# Altium PCB PCB_all_try_6_save.PcbDoc (part 2 of 2)
Units mm, origin at the board's own origin, x right, y up, seen from the top; angles counter-clockwise.
Board outline 465 x 330 mm, 2 copper layers (Top Layer, Bottom Layer); 484 components, 419 nets, 1565 pads, 0 vias.
Unrouted connection lines stored in the file: 1113.
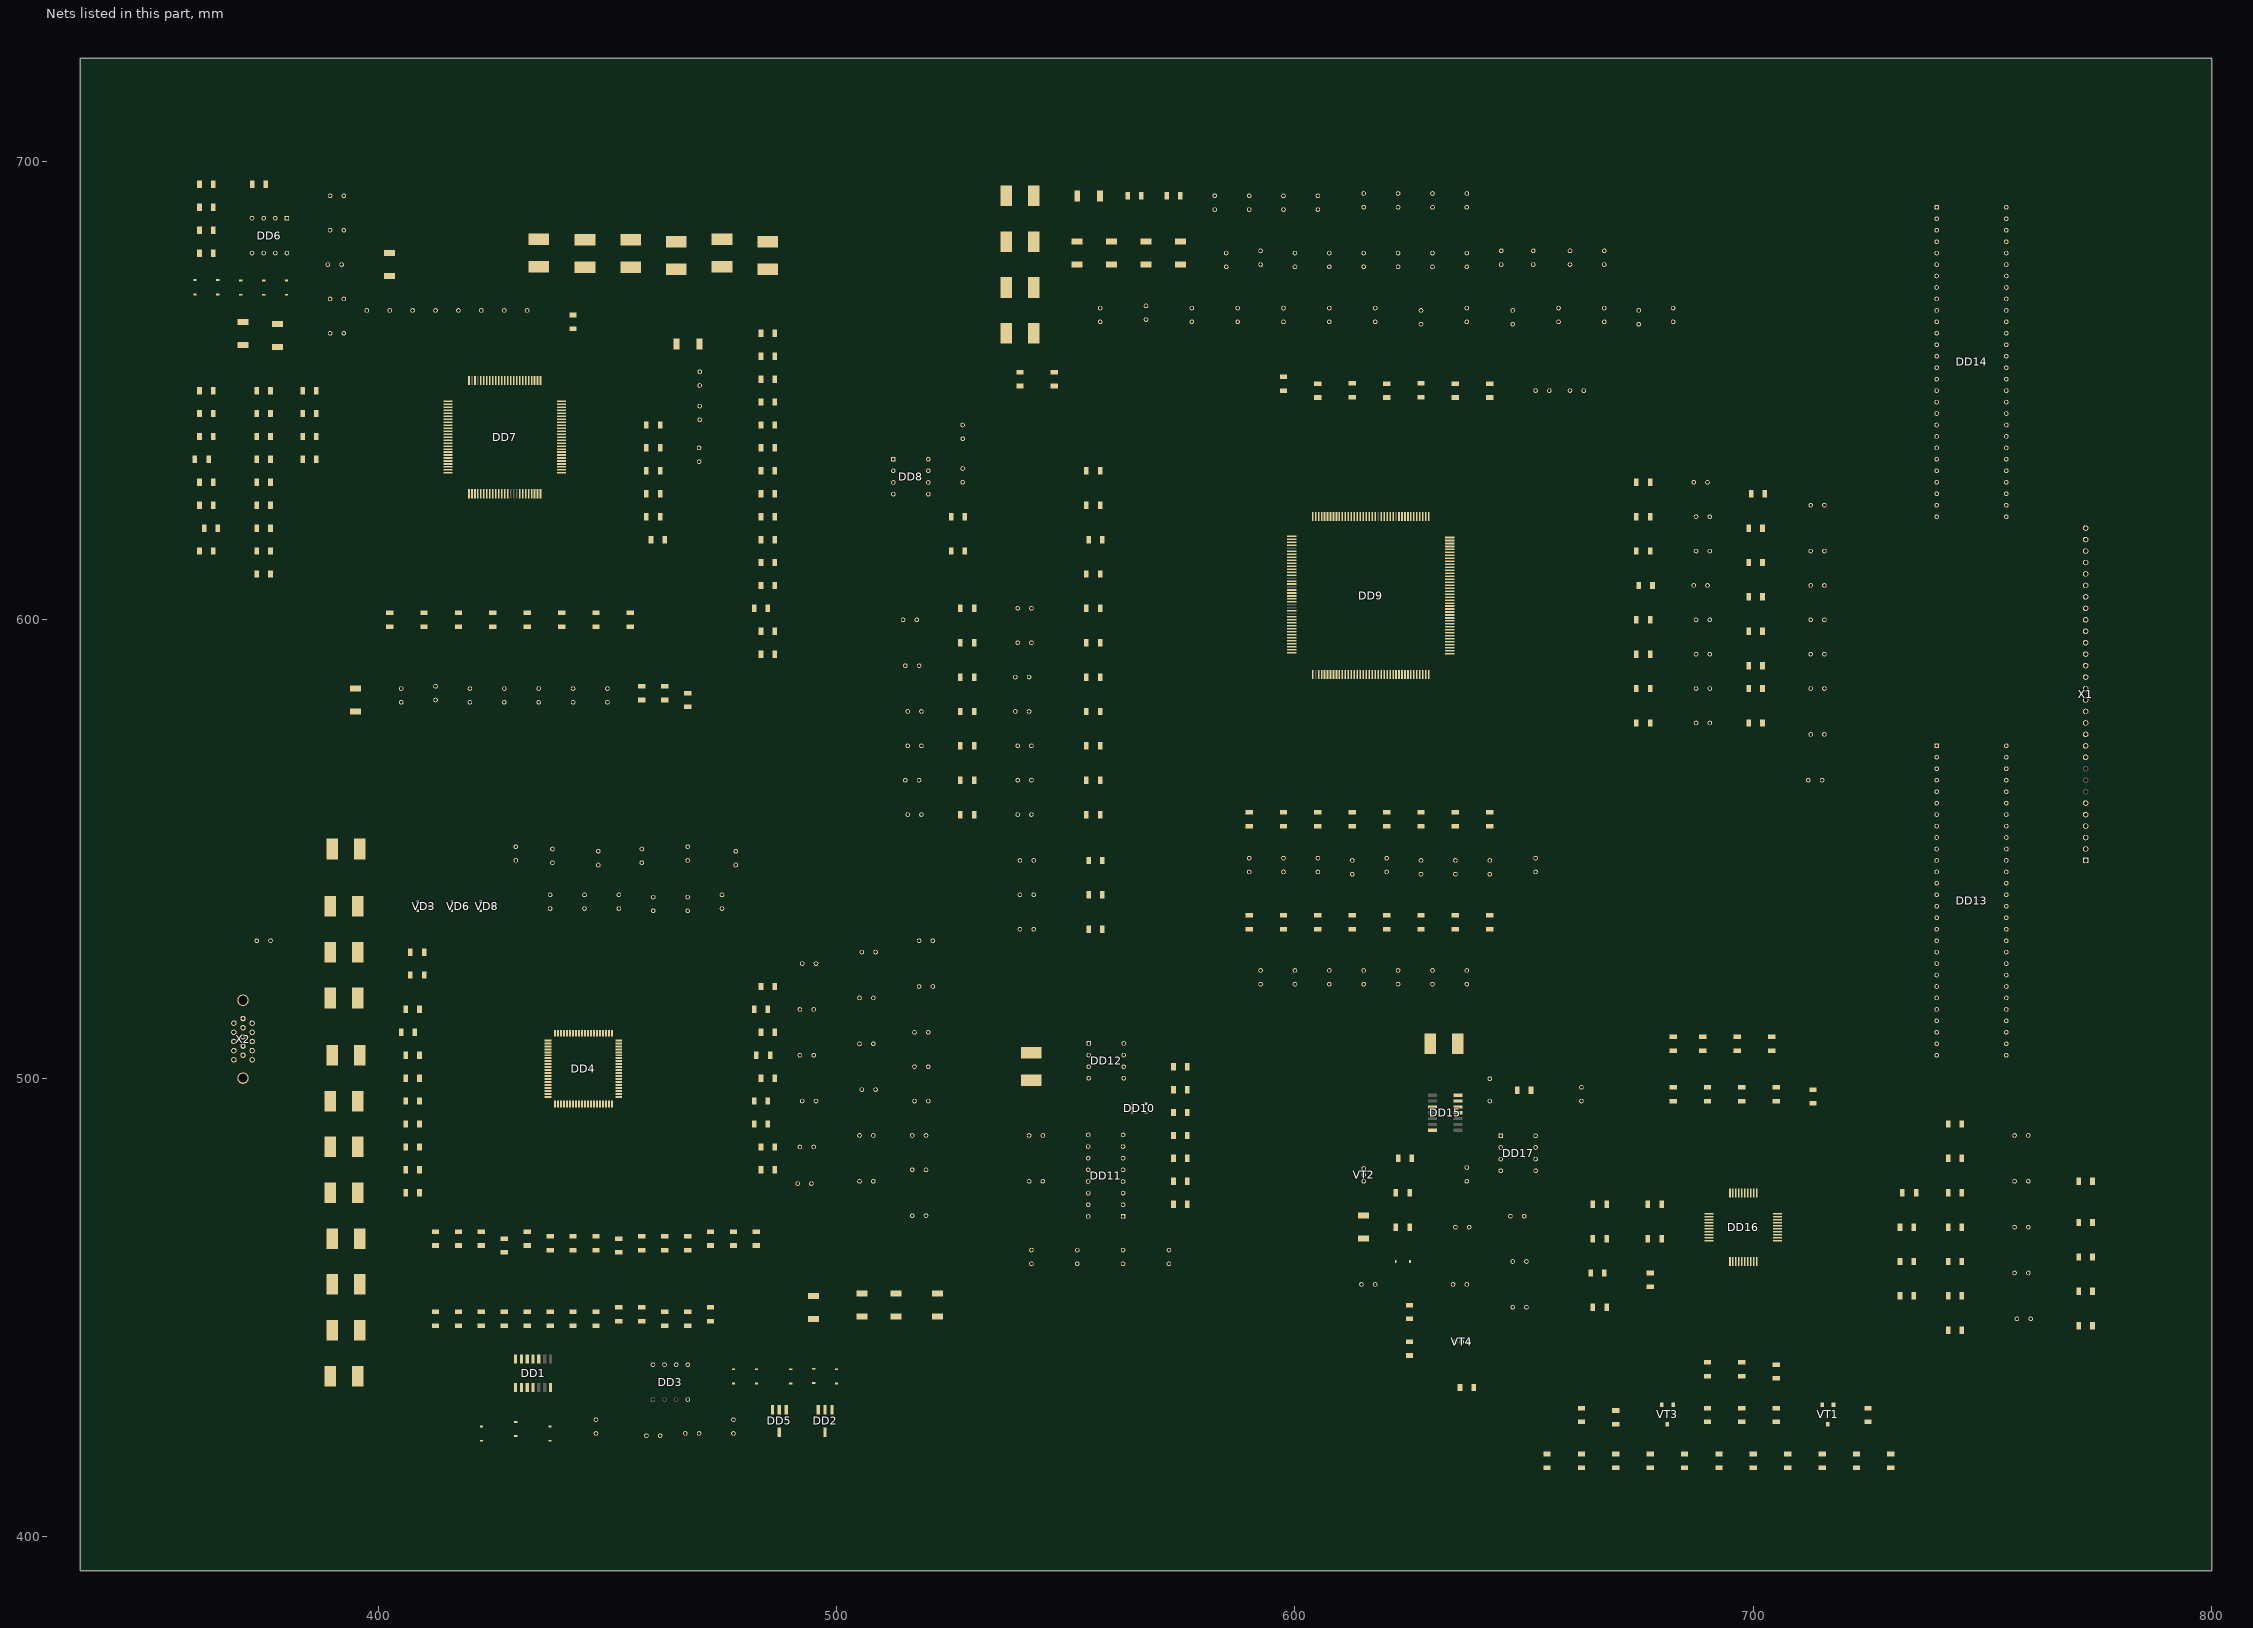
[diagram p2: the nets of this part, all layers, seen from the top]

## Part data
DD10: library part 74AHC1G14-TA
X2: library part VGA_connector
DD4: Built_By=EMA_UL_Team, Copyright="Copyright (C) 2018 Accelerated Designs. All rights reserved", Manufacturer_Part_Number=AD9883ABSTZ-140, RefDes=RefDes, SourceLibrary=Analog_2012-01-01_6, Type=DEV, Vendor="Analog Devices Inc"

## Nets (pads, with @x,y where several pads share a name; then routed paths per layer and width w, separated by ;. In a path a pad name is that pad's centre, name@x,y a point inside that pad or via, vN(x,y) a via of type N, cw(c..) or ccw(c..) an arc to the next point about the centre after c; other vN are vias at no path point)
3_3Va: L13.1 L14.1 L15.1 L18.1
3V3: C62.2 C171.1 DD1.14 DD8.8 DD15.14 DD17.2 DD17.8 L1.2 L7.2 L12.2 R110.1 R111.1 R181.2 R182.2 R187.2 R188.2 R202.2 R203.2 R210.1 R211.1 R212.1 R213.1 R214.1 R215.1 R216.1 R217.1 R219.1 R220.1 R221.1 R222.1 R223.1 R224.1 R225.1 R226.2 R227.1 R228.1 R229.1 R230.1 R238.2 R239.2 VT2.2 VT4.2
3V3b: C134.1 L19.1 L21.1 L22.1 L23.1
3V3LVDSA: C136.1 C139.2 C142.2 C145.2 C148.2 DD13.44 DD14.44 L22.2
3V3LVDSD: C135.1 C138.2 C141.2 C144.2 C147.2 C150.2 C151.2 C152.2 C153.2 C154.2 C155.2 C156.2 C157.2 DD13.1 DD13.9 DD13.26 DD14.1 DD14.9 DD14.26 L21.2 R177.2 R179.2
3V3LVDSP: C137.1 C140.2 C143.2 C146.2 C149.2 DD13.34 DD14.34 L23.2
3V3SD: C64.1 C65.2 C66.2 C67.2 C68.2 C69.2 C71.2 C73.2 C75.2 C77.2 C81.2 C85.2 C89.2 C94.2 C98.2 DD9.17 DD9.36 DD9.45 DD9.46 DD9.56 DD9.67 DD9.77 DD9.91 DD9.92 DD9.99 DD9.109 DD9.119 DD9.129 DD9.141 DD9.150 DD9.160 L19.2
5V_DDC: R50.2 R51.2 VD15.1
5V_STBY: C6.1 C9.1 C35.1 C36.1 C169.1 DD2.2 DD2.4 DD5.2 DD5.4 R1.2 R206.1 R207.1 R209.1 R236.2 VD9.1 VD16.1
5V_VGA: C172.2 VD10.1 X2.9
5Va: C130.2 DD11.16
5Vb: C128.1 DD10.5 L20.2
12MHZ: C158.1 DD9.16 DD15.12 L24.1
9883_HS: DD4.30 R14.2
9883_VS: DD1.10 DD4.31
+3V3: C1.1 C2.1 C3.1 C4.1 DD4.11 DD4.22 DD4.23 DD4.69 DD4.78 DD4.79 L1.1
A3_3V: C57.1 C58.2 C59.2 C60.2 DD7.82 DD7.84 DD7.88 DD7.95 L18.2 R59.1
A3V3: C12.1 C14.1 C26.1 C28.1 C30.1 C31.1 C32.1 C33.1 C34.1 DD2.3 DD4.26 DD4.27 DD4.39 DD4.42 DD4.45 DD4.46 DD4.51 DD4.52 DD4.59 DD4.62 L7.1
ADC1: DD16.34 R222.2
ADC2: DD16.33 R224.2
ASIC_H: C39.1 L9.2 R108.2
ASIC_RESET: DD8.7 DD11.9 DD16.11 R118.2 R182.1
ASIC_SCL: DD16.26 R114.2 R221.2
ASIC_SDA: DD16.25 R115.2 R219.2
AUDIO_EN: DD16.38 R215.2
AUDIO_MUTE: DD16.22 R212.2 R233.1
B_IN: L4.1 VD3.3 X2.3
B_INA0: DD9.147 R32.2
B_INA1: DD9.148 R31.2
B_INA2: DD9.149 R30.2
B_INA3: DD9.151 R29.2
B_INA4: DD9.152 R28.2
B_INA5: DD9.153 R27.2
B_INA6: DD9.154 R26.2
B_INA7: DD9.155 R25.2
B_INB0: DD9.1 R73.2 R97.2
B_INB1: DD9.2 R72.2 R96.2
B_INB2: DD9.3 R71.2 R95.2
B_INB3: DD9.4 R70.2 R94.2
B_INB4: DD9.6 R69.2 R93.2
B_INB5: DD9.7 R68.2 R92.2
B_INB6: DD9.8 R67.2 R91.2
B_INB7: DD9.9 R66.2 R90.2
BA0: C117.2 DD14.16 R136.1
BA1: C114.2 DD14.18 R135.1
BA2: C111.2 DD14.15 R134.1
BA3: C108.2 DD14.19 R133.1
BA4: C105.2 DD14.20 R132.1
BA5: C102.2 DD14.22 R131.1
BA6: C99.2 DD14.23 R128.1
BA7: C95.2 DD14.24 R127.1
BB0: C91.2 DD13.16 R126.1
BB1: C86.2 DD13.18 R125.1
BB2: C82.2 DD13.15 R124.1
BB3: C78.2 DD13.19 R123.1
BB4: C76.2 DD13.20 R122.1
BB5: C74.2 DD13.22 R121.1
BB6: C72.2 DD13.23 R120.1
BB7: C70.2 DD13.24 R119.1
BL_ON_OFF: R206.2
COAST: C25.2 DD4.29 R18.2
D3_3V: C42.1 C45.2 C47.2 C50.2 DD7.38 DD7.67 L13.2
D3_V3: DD7.3 DD7.4 DD7.6 DD7.7
DE_IN: DD9.159 R98.2
FBLK: DD9.23 R189.2
FCLK1: DD9.29 DD12.1
G_IN: L5.1 VD6.3 X2.2
G_INA0: DD9.125 R40.2
G_INA1: DD9.126 R39.2
G_INA2: DD9.127 R38.2
G_INA3: DD9.128 R37.2
G_INA4: DD9.130 R36.2
G_INA5: DD9.131 R35.2
G_INA6: DD9.133 R34.2
G_INA7: DD9.134 R33.2
G_INB0: DD9.136 R81.2 R89.2
G_INB1: DD9.137 R80.2 R88.2
G_INB2: DD9.139 R79.2 R87.2
G_INB3: DD9.140 R78.2 R86.2
G_INB4: DD9.142 R77.2 R85.2
G_INB5: DD9.143 R76.2 R84.2
G_INB6: DD9.144 R75.2 R83.2
G_INB7: DD9.145 R74.2 R82.2
GA0: C126.2 DD14.8 R152.1
GA1: C124.2 DD14.10 R151.1
GA2: C122.2 DD14.4 R150.1
GA3: C120.2 DD14.6 R149.1
GA4: C118.2 DD14.7 R148.1
GA5: C115.2 DD14.11 R147.1
GA6: C112.2 DD14.12 R146.1
GA7: C109.2 DD14.14 R145.1
GB0: C106.2 DD13.8 R144.1
GB1: C103.2 DD13.10 R143.1
GB2: C100.2 DD13.4 R142.1
GB3: C96.2 DD13.6 R141.1
GB4: C92.2 DD13.7 R140.1
GB5: C87.2 DD13.11 R139.1
GB6: C83.2 DD13.12 R138.1
GB7: C79.2 DD13.14 R137.1
GND: C1.2 C2.2 C3.2 C4.2 C5.2 C6.2 C7.2 C8.2 C9.2 C10.2 C11.2 C12.2 C13.2 C14.2 C15.2 C17.2 C18.2 C19.2 C25.1 C26.2 C27.1 C28.2 C29.1 C30.2 C31.2 C32.2 C33.2 C34.2 C35.2 C36.2 C37.2 C38.2 C39.2 C40.2 C41.2 C42.2 C43.2 C44.1 C45.1 C46.1 C47.1 C48.1 C49.1 C50.1 C51.1 C52.2 C53.1 C54.1 C55.1 C56.1 C57.2 C58.1 C59.1 C60.1 C61.1 C62.1 C63.1 C64.2 C65.1 C66.1 C67.1 C68.1 C69.1 C70.1 C71.1 C72.1 C73.1 C74.1 C75.1 C76.1 C77.1 C78.1 C79.1 C80.1 C81.1 C82.1 C83.1 C84.1 C85.1 C86.1 C87.1 C88.1 C89.1 C90.1 C91.1 C92.1 C93.1 C94.1 C95.1 C96.1 C97.1 C98.1 C99.1 C100.1 C101.1 C102.1 C103.1 C104.1 C105.1 C106.1 C107.1 C108.1 C109.1 C110.1 C111.1 C112.1 C113.1 C114.1 C115.1 C116.1 C117.1 C118.1 C119.1 C120.1 C121.1 C122.1 C123.1 C124.1 C125.1 C126.1 C127.1 C128.2 C129.2 C130.1 C131.2 C132.2 C133.2 C134.2 C135.2 C136.2 C137.2 C138.1 C139.1 C140.1 C141.1 C142.1 C143.1 C144.1 C145.1 C146.1 C147.1 C148.1 C149.1 C150.1 C151.1 C152.1 C153.1 C154.1 C155.1 C156.1 C157.1 C158.2 C159.1 C160.2 C161.2 C162.1 C163.2 C164.2 C165.1 C166.2 C168.2 C169.2 C170.2 C171.2 C172.1 DD1.7 DD2.1 DD3.4 DD4.1 DD4.10 DD4.20 DD4.21 DD4.24 DD4.25 DD4.28 DD4.32 DD4.36 DD4.38 DD4.40 DD4.41 DD4.44 DD4.47 DD4.50 DD4.53 DD4.55 DD4.60 DD4.61 DD4.63 DD4.68 DD4.80 DD5.1 DD6.1 DD6.2 DD6.4 DD7.1 DD7.5 DD7.19 DD7.28 DD7.39 DD7.45 DD7.58 DD7.68 DD7.76 DD7.98 DD7.100 DD8.1 DD8.2 DD8.3 DD8.4 DD9.12 DD9.35 DD9.43 DD9.48 DD9.51 DD9.61 DD9.71 DD9.72 DD9.82 DD9.83 DD9.94 DD9.104 DD9.116 DD9.124 DD9.135 DD9.146 DD9.156 DD10.3 DD11.6 DD11.7 DD11.8 DD12.3 DD12.4 DD13.5 DD13.13 DD13.21 DD13.25 DD13.27 DD13.28 DD13.29 DD13.33 DD13.35 DD13.36 DD13.43 DD13.49 DD13.53 DD14.5 DD14.13 DD14.21 DD14.25 DD14.27 DD14.28 DD14.29 DD14.33 DD14.35 DD14.36 DD14.43 DD14.49 DD14.53 DD15.7 DD16.20 DD17.1 DD17.3 DD17.4 DD17.7 L16.1 L17.1 R3.1 R5.1 R15.1 R16.1 R17.1 R49.1 R178.1 R180.1 R204.1 R205.1 R218.1 VD1.1 VD2.1 VD3.1 VD4.1 VD5.1 VD6.1 VD7.1 VD8.1 VD11.1 VD12.1 VD13.1 VD14.1 VD17.1 VT3.2 X1.4 X1.5 X1.6 X1.30 X2.4 X2.5 X2.6 X2.7 X2.8 X2.11 X2.16 X2.17
HP_SENSE: DD16.37 R217.2
HSYNC_D: DD7.48 DD11.12
HSYNC_IN: DD11.14 R184.1
HSYNC_X: DD9.41 DD10.2 R170.1
INPUT_SELECT: DD11.10 DD11.11 DD16.12 R181.1
LCD_CLK: DD13.31 DD14.31 R130.1
LCD_DE: DD13.30 DD14.30 R129.1
LCD_VCC: X1.1 X1.2 X1.3
LVDS_PD: DD13.32 DD14.32 DD16.39 R213.2
MCU_H_IN: DD11.13 L11.2
MCU_ISP_SCL: R12.1 R185.1
MCU_ISP_SDA: R13.1 R186.1
MCU_SCL1: DD16.32 R24.1 R230.2 R234.1
MCU_SDA1: DD16.31 R23.1 R229.2 R235.1
MCU_V_IN: DD11.1 L10.2
NetC7_1: C7.1 DD1.13 R6.2
NetC8_1: C8.1 DD1.1 R7.2
NetC11_1: C11.1 R11.2 R14.1
NetC15_1: C15.1 DD3.5 DD3.6 DD3.8 R9.2 R10.2 R12.2 R13.2 VD9.2 VD10.2 VD11.2
NetC16_1: C16.1 C20.1 DD4.33
NetC17_1: C17.1 C21.2 R19.2
NetC18_1: C18.1 C22.2 C23.2 R20.2
NetC19_1: C19.1 C24.2 R21.2
NetC20_2: C20.2 R22.2
NetC21_1: C21.1 DD4.54
NetC22_1: C22.1 DD4.49
NetC23_1: C23.1 DD4.48
NetC24_1: C24.1 DD4.43
NetC27_2: C27.2 DD4.58
NetC29_2: C29.2 DD4.37
NetC49_2: C49.2 C52.1 DD6.7 DD6.8 VD14.2 VD15.2 VD16.2
NetC55_2: C55.2 DD7.46 R98.1
NetC56_2: C56.2 DD7.44 R99.1
NetC61_2: C61.2 DD9.157 R108.1
NetC63_2: C63.2 DD9.158 R109.1
NetC90_2: C90.2 DD9.26 R169.2
NetC129_1: C129.1 DD12.2 R170.2 R173.2
NetC132_1: C132.1 C133.1 DD12.5 DD12.7 L20.1
NetC159_2: C159.2 DD16.13 R183.2
NetC160_1: C160.1 DD16.7 R199.2 ZQ1.2
NetC161_1: C161.1 DD16.8 R199.1 ZQ1.1
NetC162_2: C162.2 DD16.14 R184.2
NetC163_1: C163.1 C165.2 C167.2 DD16.18 R198.1 R200.1 R201.1
NetC164_1: C164.1 DD16.4 R195.1
NetC166_1: C166.1 DD16.3 R194.1
NetC167_1: C167.1 DD16.19 R205.2 VD17.2
NetC168_1: C168.1 DD16.2 R193.1
NetC170_1: C170.1 R208.2 VT1.1
NetDD1_2: DD1.2 DD1.3
NetDD1_4: DD1.4 R11.1
NetDD1_11: DD1.11 DD1.12
NetDD4_2: DD4.2 R33.1
NetDD4_3: DD4.3 R34.1
NetDD4_4: DD4.4 R35.1
NetDD4_5: DD4.5 R36.1
NetDD4_6: DD4.6 R37.1
NetDD4_7: DD4.7 R38.1
NetDD4_8: DD4.8 R39.1
NetDD4_9: DD4.9 R40.1
NetDD4_12: DD4.12 R41.1
NetDD4_13: DD4.13 R42.1
NetDD4_14: DD4.14 R43.1
NetDD4_15: DD4.15 R44.1
NetDD4_16: DD4.16 R45.1
NetDD4_17: DD4.17 R46.1
NetDD4_18: DD4.18 R47.1
NetDD4_19: DD4.19 R48.1
NetDD4_56: DD4.56 R24.2
NetDD4_57: DD4.57 R23.2
NetDD4_64: DD4.64 L10.1
NetDD4_65: DD4.65 L11.1
NetDD4_66: DD4.66 L9.1
NetDD4_67: DD4.67 L8.1
NetDD4_70: DD4.70 R25.1
NetDD4_71: DD4.71 R26.1
NetDD4_72: DD4.72 R27.1
NetDD4_73: DD4.73 R28.1
NetDD4_74: DD4.74 R29.1
NetDD4_75: DD4.75 R30.1
NetDD4_76: DD4.76 R31.1
NetDD4_77: DD4.77 R32.1
NetDD6_3: DD6.3 R49.2
NetDD6_5: DD6.5 R51.1 R53.2 VD13.2
NetDD6_6: DD6.6 R50.1 R52.2 VD12.2
NetDD7_8: DD7.8 R56.1 R62.2
NetDD7_9: DD7.9 R57.1 R62.1
NetDD7_10: DD7.10 R73.1
NetDD7_11: DD7.11 R72.1
NetDD7_12: DD7.12 R71.1
NetDD7_13: DD7.13 R70.1
NetDD7_14: DD7.14 R69.1
NetDD7_15: DD7.15 R68.1
NetDD7_16: DD7.16 R67.1
NetDD7_17: DD7.17 R66.1
NetDD7_20: DD7.20 R89.1
NetDD7_21: DD7.21 R88.1
NetDD7_22: DD7.22 R87.1
NetDD7_23: DD7.23 R86.1
NetDD7_24: DD7.24 R85.1
NetDD7_25: DD7.25 R84.1
NetDD7_26: DD7.26 R83.1
NetDD7_27: DD7.27 R82.1
NetDD7_30: DD7.30 R107.1
NetDD7_31: DD7.31 R106.1
NetDD7_32: DD7.32 R105.1
NetDD7_33: DD7.33 R104.1
NetDD7_34: DD7.34 R103.1
NetDD7_35: DD7.35 R102.1
NetDD7_36: DD7.36 R101.1
NetDD7_37: DD7.37 R100.1
NetDD7_49: DD7.49 R97.1
NetDD7_50: DD7.50 R96.1
NetDD7_51: DD7.51 R95.1
NetDD7_52: DD7.52 R94.1
NetDD7_53: DD7.53 R93.1
NetDD7_54: DD7.54 R92.1
NetDD7_55: DD7.55 R91.1
NetDD7_56: DD7.56 R90.1
NetDD7_59: DD7.59 R81.1
NetDD7_60: DD7.60 R80.1
NetDD7_61: DD7.61 R79.1
NetDD7_62: DD7.62 R78.1
NetDD7_63: DD7.63 R77.1
NetDD7_64: DD7.64 R76.1
NetDD7_65: DD7.65 R75.1
NetDD7_66: DD7.66 R74.1
NetDD7_69: DD7.69 R65.1
NetDD7_70: DD7.70 R64.1
NetDD7_71: DD7.71 R63.1
NetDD7_72: DD7.72 R61.1
NetDD7_73: DD7.73 R60.1
NetDD7_74: DD7.74 R58.1
NetDD7_75: DD7.75 R55.1
NetDD7_77: DD7.77 R54.1
NetDD7_80: DD7.80 RX_D2+.1
NetDD7_81: DD7.81 RX_D2-.1
NetDD7_85: DD7.85 RX_D1+.1
NetDD7_86: DD7.86 RX_D1-.1
NetDD7_90: DD7.90 RX_D0+.1
NetDD7_91: DD7.91 RX_D0-.1
NetDD7_93: DD7.93 RX_CLK+.1
NetDD7_94: DD7.94 RX_CLK-.1
NetDD7_96: DD7.96 R59.2
NetDD8_5: DD8.5 R111.2 R117.2
NetDD9_11: DD9.11 R113.1 R117.1
NetDD9_13: DD9.13 R114.1
NetDD9_14: DD9.14 R115.1
NetDD9_19: DD9.19 R118.1
NetDD9_33: DD9.33 R130.2
NetDD9_34: DD9.34 R129.2
NetDD9_37: DD9.37 R168.2
NetDD9_38: DD9.38 R167.2
NetDD9_39: DD9.39 R166.2
NetDD9_40: DD9.40 R165.2
NetDD9_44: DD9.44 R164.2
NetDD9_47: DD9.47 R163.2
NetDD9_49: DD9.49 R162.2
NetDD9_50: DD9.50 R161.2
NetDD9_52: DD9.52 R160.2
NetDD9_53: DD9.53 R159.2
NetDD9_54: DD9.54 R158.2
NetDD9_55: DD9.55 R157.2
NetDD9_57: DD9.57 R156.2
NetDD9_58: DD9.58 R155.2
NetDD9_59: DD9.59 R154.2
NetDD9_60: DD9.60 R153.2
NetDD9_62: DD9.62 R152.2
NetDD9_63: DD9.63 R151.2
NetDD9_64: DD9.64 R150.2
NetDD9_65: DD9.65 R149.2
NetDD9_66: DD9.66 R148.2
NetDD9_68: DD9.68 R147.2
NetDD9_69: DD9.69 R146.2
NetDD9_70: DD9.70 R145.2
NetDD9_73: DD9.73 R144.2
NetDD9_74: DD9.74 R143.2
NetDD9_75: DD9.75 R142.2
NetDD9_76: DD9.76 R141.2
NetDD9_78: DD9.78 R140.2
NetDD9_79: DD9.79 R139.2
NetDD9_80: DD9.80 R138.2
NetDD9_81: DD9.81 R137.2
NetDD9_84: DD9.84 R136.2
NetDD9_85: DD9.85 R135.2
NetDD9_86: DD9.86 R134.2
NetDD9_87: DD9.87 R133.2
NetDD9_88: DD9.88 R132.2
NetDD9_89: DD9.89 R131.2
NetDD9_90: DD9.90 R128.2
NetDD9_93: DD9.93 R127.2
NetDD9_95: DD9.95 R126.2
NetDD9_96: DD9.96 R125.2
NetDD9_97: DD9.97 R124.2
NetDD9_98: DD9.98 R123.2
NetDD9_100: DD9.100 R122.2
NetDD9_101: DD9.101 R121.2
NetDD9_102: DD9.102 R120.2
NetDD9_103: DD9.103 R119.2
NetDD10_4: DD10.4 R173.1
NetDD11_3: DD11.3 R172.2
NetDD11_4: DD11.4 R174.1
NetDD11_5: DD11.5 R171.2
NetDD12_6: DD12.6 R176.1
NetDD12_8: DD12.8 R175.1
NetDD13_17: DD13.17 R177.1 R178.2
NetDD13_37: DD13.37 X1.10
NetDD13_38: DD13.38 X1.11
NetDD13_39: DD13.39 X1.12
NetDD13_40: DD13.40 X1.13
NetDD13_41: DD13.41 X1.14
NetDD13_42: DD13.42 X1.15
NetDD13_45: DD13.45 X1.16
NetDD13_46: DD13.46 X1.17
NetDD13_47: DD13.47 X1.18
NetDD13_48: DD13.48 X1.19
NetDD14_17: DD14.17 R179.1 R180.2
NetDD14_37: DD14.37 X1.20
NetDD14_38: DD14.38 X1.21
NetDD14_39: DD14.39 X1.22
NetDD14_40: DD14.40 X1.23
NetDD14_41: DD14.41 X1.24
NetDD14_42: DD14.42 X1.25
NetDD14_45: DD14.45 X1.26
NetDD14_46: DD14.46 X1.27
NetDD14_47: DD14.47 X1.28
NetDD14_48: DD14.48 X1.29
NetDD15_3: DD15.3 L24.2
NetDD15_11: DD15.11 R196.1 R197.1
NetDD15_13: DD15.13 DD16.9 R188.1
NetDD16_1: DD16.1 R192.1
NetDD16_6: DD16.6 R202.1
NetDD16_15: DD16.15 R185.2 R198.2
NetDD16_16: DD16.16 R186.2 R200.2
NetDD16_23: DD16.23 R214.2 R231.1
NetDD16_24: DD16.24 R216.2 R232.1
NetDD16_40: DD16.40 R207.2 R208.1
NetDD16_42: R189.1 R204.2
NetDD16_43: R190.1
NetDD16_44: R191.1
NetDD17_5: DD17.5 R235.2
NetDD17_6: DD17.6 R234.2
NetL2_2: L2.2 R9.1 VD4.2
NetL3_2: L3.2 R10.1 VD7.2
NetL4_2: L4.2 R15.2 R19.1
NetL5_2: L5.2 R16.2 R20.1
NetL6_2: L6.2 R17.2 R21.1
NetR209_2: R209.2 VT1.3
NetR218_2: R218.2 R226.1 VT1.2
NetR231_2: R231.2 VT2.1
NetR232_2: R232.2 VT4.1
NetR233_2: R233.2 VT3.1
NetR236_1: R236.1 R237.1 VT3.3
NetR238_1: R238.1 VT4.3
NetR239_1: R239.1 VT2.3
O3_3V: C43.1 C46.2 C48.2 C51.2 C53.2 C54.2 DD7.18 DD7.29 DD7.43 DD7.57 DD7.78 L14.2
OSD_B: DD9.22 R190.2
OSD_CLK: C131.1 DD9.30 R175.2 R176.2 R193.2
OSD_G: DD9.21 R191.2
OSD_HS: DD9.31 R194.2
OSD_R: DD9.20 R192.2
OSD_VS: DD9.32 R195.2
P3_3V: C41.1 C44.2 L15.2
P3V3: C16.2 C38.1 C40.1 DD4.34 DD4.35 DD5.3 L12.1 R22.1 R52.1 R53.1 R237.2
PD: DD7.2 DD16.30 R228.2
PDO: DD16.29 R57.2 R227.2
PKA_GND: DD7.79 DD7.83 DD7.87 DD7.89 DD7.92 L16.2 L17.2
POWER_ON_OFF: DD16.21 R211.2
PSC0: DD16.35 R220.2
PSC1: DD16.36 R210.2
R_IN: L6.1 VD8.3 X2.1
R_INA0: DD9.105 R48.2
R_INA1: DD9.106 R47.2
R_INA2: DD9.107 R46.2
R_INA3: DD9.108 R45.2
R_INA4: DD9.110 R44.2
R_INA5: DD9.111 R43.2
R_INA6: DD9.112 R42.2
R_INA7: DD9.113 R41.2
R_INB0: DD9.114 R65.2 R107.2
R_INB1: DD9.115 R64.2 R106.2
R_INB2: DD9.117 R63.2 R105.2
R_INB3: DD9.118 R61.2 R104.2
R_INB4: DD9.120 R60.2 R103.2
R_INB5: DD9.121 R58.2 R102.2
R_INB6: DD9.122 R55.2 R101.2
R_INB7: DD9.123 R54.2 R100.2
RA0: C127.2 DD14.50 R168.1
RA1: C125.2 DD14.2 R167.1
RA2: C123.2 DD14.51 R166.1
RA3: C121.2 DD14.52 R165.1
RA4: C119.2 DD14.54 R164.1
RA5: C116.2 DD14.55 R163.1
RA6: C113.2 DD14.56 R162.1
RA7: C110.2 DD14.3 R161.1
RB0: C107.2 DD13.50 R160.1
RB1: C104.2 DD13.2 R159.1
RB2: C101.2 DD13.51 R158.1
RB3: C97.2 DD13.52 R157.1
RB4: C93.2 DD13.54 R156.1
RB5: C88.2 DD13.55 R155.1
RB6: C84.2 DD13.56 R154.1
RB7: C80.2 DD13.3 R153.1
ROM_SCL: DD16.27 R112.2 R171.1 R223.2
ROM_SCL_ASIC: DD9.10 R112.1 R116.1 R172.1
ROM_SCL_EEPROM: DD8.6 R110.2 R116.2 R174.2
ROM_SDA: DD16.28 R113.2 R225.2
SCDT: DD16.17 R56.2 R201.2
VCLK00: DD9.28 R196.2
VCLK01: R99.2 R169.1 R197.2
VGA_CON: DD16.10 R8.2 R187.1
VGA_CONN: C5.1 R1.1 R8.1 VD5.2 X2.10
VGA_HS: R2.1 R3.2 R7.1 VD2.2 X2.13
VGA_SCL: L2.1 X2.15
VGA_SDA: L3.1 X2.12
VGA_VS: C10.1 C13.1 DD3.7 R2.2 R4.1 R4.2 R5.2 R6.1 VD1.2 VD3.2 VD6.2 VD8.2 X2.14
VLCK00: C37.1 L8.2
VSYNC_D: DD7.47 DD11.2
VSYNC_IN: DD11.15 R183.1
VSYNC_MCU: DD16.5 R18.1 R109.2 R203.1
pads on no net: DD1.5 DD1.6 DD1.8 DD1.9 DD3.1 DD3.2 DD3.3 DD7.40 DD7.41 DD7.42 DD7.97 DD7.99 DD9.5 DD9.15 DD9.18 DD9.24 DD9.25 DD9.27 DD9.42 DD9.132 DD9.138 DD10.1 DD15.1 DD15.2 DD15.4 DD15.5 DD15.6 DD15.8 DD15.9 DD15.10 X1.7 X1.8 X1.9

## Silkscreen, mask and mechanical layers (free items; w line width, h text height)
Mechanical 7:
  text "BOASFORMAT|А1|1|0|766141733|331102362|1000000000|2:1|" at 0,2540 h0
  text "SET2|Superlayer=MechanicalLayer7|Wsuperlayer=MechanicalLayer8|Layergrid=MechanicalLayer9|Werase=MechanicalLayer11|Layermark=MechanicalLayer12|Layerstamp=MechanicalLayer13|Thinline=0,18|Basicline=0,6|Gridline=0,18|Boardline=0,6|Contourpolygonline=0,6|PcbGridStep=1,25|PcbGridCleareanceAtView=0|PcbGridNumberEach=l4|PcbGridLineEach=l2|PcbGridCountSecondaryStrip=1|PcbGridEnabledStrip=True|PcbSignalGridEnabled=True|PcbSignalShowBukva=True|RealSignalLayerNames=False|PcbGridEnabledBothSide=False|PcbPolarGridEnabled=False|PcbPolarGridAngleStep=10|PcbPolarGridRadialStep=10|SilkShowPad=True|SilkViewName=Слой маркировки|SilkShowHole=True|SilkShowAxis=True|SilkShowBukva=True|SilkShowGrid=False|SolderShowGrid=False|SolderViewName=Слой маски|SolderShowAxis=False|SolderShowBukva=False|MainViewShowGrid=False|MainViewUseShapesDrill=False|ShowBukvaOnSboky=True|Density=2,2|TableName=Таблица 1|RazrezWidth=100|RealLayerNames=False|RazrezShowBukva=False|RazrezBukva=В-В|Sher=Rz 160|Asstoplayer=MechanicalLayer1|Asstoplayer2=None|Assbottomlayer=MechanicalLayer2|Assbottomlayer2=None|AssMinDiameterHoles=2|AssDim=True|AssMech=False|AssSilk=False|AssComponentSilk=False|AssFreeSilk=False|AssSmdPads=False|AssGridEnable=False|Mirror=Horisontal|PcbGridFontSize=5|PcbGridCenterZero=False|TTStampDistance=12|MainFontSize=5|PolyStep=2|PcbDrillDrawingGridEnabled=False|PcbDrillDrawingViewName=Слой сверловки|PcbDrillDrawingShowBukva=False|PcbDrillDrawingShowAxis=False|PcbSignalLayersUseDrill=False|PcbSignalLayersUseShapesDrill=False|PcbSignalLayersShowAxis=False" at 0,0.025 h0
  text "BOASVIADRILLTABLE:" at 0,0 h0
  text "2BOASDRILLTABLE:none,236220,Да,498,True,|none,275591,Да,15,True,|none,314961,Да,30,True,|none,787402,Да,2,True," at 0,0 h0
Mechanical 13:
  lines w0.18: 651,1956 716,1956 ; 651,1961 716,1961 ; 651,1966 716,1966 ; 651,1971 716,1971 ; 651,1976 716,1976 ; 651,1991 716,1991 ; 651,1996 716,1996 ; 651,2001 716,2001 ; 790.96,1971 790.96,1986 ; 795.98,1971 795.98,1986 ; 812.7,2522.1 815.8,2516.7 821.4,2526.5
  lines w0.6: 8,1976 20,1976 ; 8,2011 20,2011 ; 8,2036 20,2036 ; 8,2061 20,2061 ; 8,2178 20,2178 ; 13,1951 13,2096 ; 13,2118 13,2238 ; 20,2096 8,2096 8,1951 20,1951 ; 20,2118 8,2118 8,2238 20,2238 ; 20,2521 90,2521 90,2535 ; 651,1951 651,2006 836,2006 ; 651,1981 716,1981 ; 651,1986 716,1986 ; 658,1981 658,2006 ; 668,1951 668,2006 ; 691,1951 691,2006 ; 706,1951 706,2006 ; 716,1951 716,2006 836,2006 ; 716,1966 786,1966 836,1966 ; 716,1991 836,1991 ; 765,2524 770,2515 777.6,2529 ; 777.7,2529 828,2529 ; 786,1951 786,1991 ; 786,1971 836,1971 ; 786,1986 801,1986 836,1986 ; 801,1971 801,1991 ; 806.57,1966 806.57,1971 ; 818,1971 818,1991 ; 836,2014 836,2006 ; 20,1951 836,1951 836,2535 20,2535 20,1951
  text "Rz 160" at 777.7,2516.7 h10.75
  text "(" at 809,2516.7 h10.75
  text ")" at 820,2516.7 h10.75
  text "Перв. примен." at 11.974,2197.368 h5.38 r90
  text "Справ. №" at 11.974,2140.775 h5.38 r90
  text "Подп. и дата" at 11.974,2068.957 h5.38 r90
  text "Инв. № дубл." at 11.974,2039.454 h5.38 r90
  text "Взам. инв. №" at 11.974,2014.496 h5.38 r90
  text "Лит." at 790.329,1987.026 h5.38
  text "Масса" at 805.108,1987.026 h5.38
  text "Масштаб" at 820.136,1987.026 h5.38
  text "Подп. и дата" at 11.974,1985.457 h5.38 r90
  text "Изм." at 651.688,1982.026 h5.38
  text "Лист" at 659.023,1982.026 h5.38
  text "№ докум." at 673.268,1982.026 h5.38
  text "Подп." at 694.917,1982.026 h5.38
  text "Дата" at 706.964,1982.026 h5.38
  text "Разраб." at 651.533,1976.771 h5.38
  text "0,62" at 804.835,1976.394 h7.68
  text "2:1" at 823.914,1976.394 h7.68
  text "Пров." at 651.533,1971.771 h5.38
  text "Т.контр." at 651.533,1966.771 h5.38
  text "Лист" at 787.442,1966.771 h5.38
  text "Листов" at 808.485,1966.771 h5.38
  text "1" at 828.424,1966.771 h5.38
  text "Н.контр." at 651.533,1956.771 h5.38
  text "Инв. № подл." at 11.974,1954.454 h5.38 r90
  text "Утв." at 651.533,1951.771 h5.38
  text "Копировал" at 726.533,1946.771 h5.38
  text "Формат А1" at 807.706,1946.771 h5.38